# EAGLE board zasilanie.old (EAGLE 8.6.3)
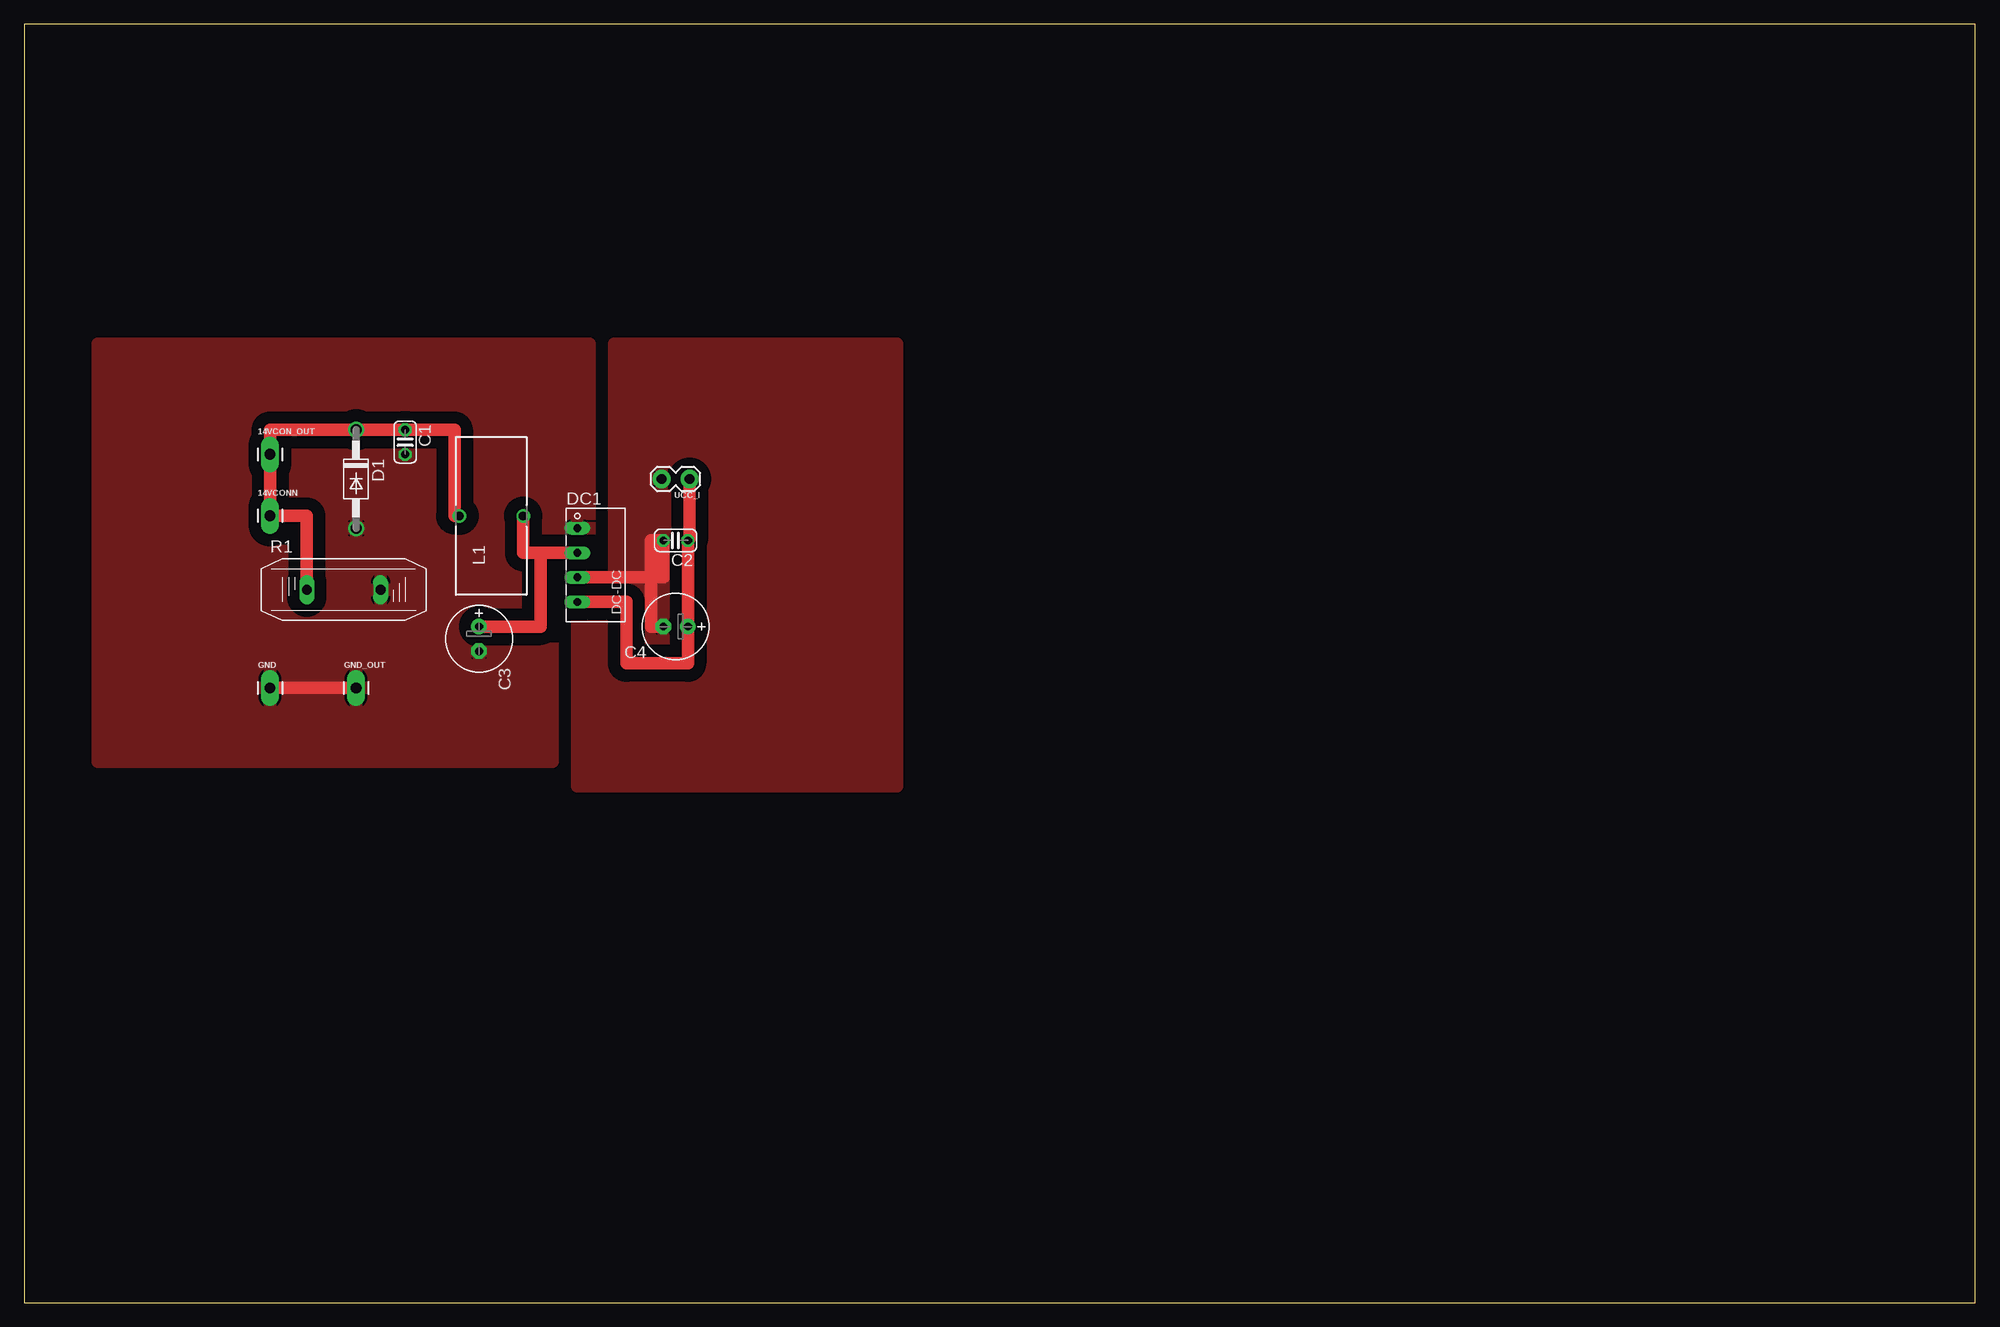
[diagram p0: board, top side]

Size 201.6 x 132.07 mm. Coordinates in mm from the lower left corner, seen from the top.
Outline: 0,0 201.6,0 201.6,132.07 0,132.07 0,0
Copper layers (1*16): Top 0.035mm / dielectric 1.5mm / Bottom 0.035mm
Design rules "default": minimum track width 6mil, minimum drill 0.35mm, track to track 6mil, track to pad 6mil, pad to pad 6mil, via to via 6mil, smd to smd 6mil, copper to edge 40mil, drill to drill 6mil, minimum pad ring 10mil, minimum via ring 8mil, stop-mask expansion 4mil, vias tented up to drill 0mil, thermal gap 10mil

## Footprints (pad centres in the part's own frame; a part is rotated, then mirrored left to right if it is on the bottom)
1X01_LONGPAD = drill 1.118 pad 1.88 long: 1 0,0
C025-024X044 = drill 0.813 octagon: 1 -1.27,0; 2 1.27,0
E2,5-7 = drill 0.813 pad 1.6: + -1.27,0 | drill 0.813 pad 1.6 octagon: - 1.27,0
DO41-10 = drill 1.118: A 5.08,0; C -5.08,0
NME = drill 0.813 long: 1 0,3.81; 2 0,1.27; 3 0,-1.27; 4 0,-3.81
TJ3-U1 = drill 0.9: 1 -3.3,0; 2 3.3,0
P595 = drill 1.016 long: 1 0,3.81; 2 0,-3.81
1X02_LOCK = drill 1.016 pad 1.88: 1 -0.178,0; 2 2.718,0

## Placement (x,y rotation side)
14VCON_OUT  [1X01_LONGPAD]  25.4,87.63 0 top
14VCONN  [1X01_LONGPAD]  25.4,81.28 0 top
C1  100nF  [C025-024X044]  39.37,88.9 270 top
C2  100nF  [C025-024X044]  67.31,78.74 180 top
C3  10uF  [E2,5-7]  46.99,68.58 270 top
C4  10uF  [E2,5-7]  67.31,69.85 180 top
D1  DIODA TRANSIL  [DO41-10]  34.29,85.09 270 top
DC1  [NME]  57.15,76.2 0 top
GND  [1X01_LONGPAD]  25.4,63.5 0 top
GND_OUT  [1X01_LONGPAD]  34.29,63.5 0 top
L1  [TJ3-U1]  48.26,81.28 0 top
R1  P595  [P595]  33.02,73.66 270 top
UCC_I  [1X02_LOCK]  68.58,85.09 180 top

## Library data of the parts
14VCON_OUT 14VCONN GND GND_OUT UCC_I = SparkFun-Connectors
C1-C4 = rcl; SPICEPREFIX: C
D1 = diode
DC1 = dc-dc-converter; MF: C & D TECHNOLOGIES, INC; MPN: NME1205D; OC_FARNELL: 1021466; OC_NEWARK: 98B8198
L1 = rcl; SPICEPREFIX: L
R1 = varistor

## Nets
GND: C1.2 C3.- D1.A DC1.1 GND.1 GND_OUT.1 R1.1
GND_I: C2.2 C4.- DC1.3 UCC_I.2
N$2: C3.+ DC1.2 L1.2
N$4: 14VCON_OUT.1 14VCONN.1 C1.1 D1.C L1.1 R1.2
UCC_I: C2.1 C4.+ DC1.4 UCC_I.1

## Tracks (layer width: path | path; a pad name or v marks a point on that pad's centre or on a via)
GND
  Top 1.27: GND.1 GND_OUT.1
  pour Top (isolate 1.27): 7.62,99.06 58.42,99.06 58.42,77.47 54.61,77.47 54.61,55.88 7.62,55.88
GND_I
  Top 1.27: C4.- 64.77,69.85 64.77,78.74 C2.2 66.04,74.93 DC1.3
  pour Top (isolate 1.27): 62.23,99.06 90.17,99.06 90.17,53.34 57.15,53.34 57.15,74.93 59.69,74.93 60.96,74.93 60.96,99.06
N$2
  Top 1.27: 53.34,77.47 53.34,69.85 C3.+ | 53.34,77.47 DC1.2 | L1.2 51.56,77.47 53.34,77.47
N$4
  Top 1.27: R1.2 29.21,81.28 14VCONN.1 14VCON_OUT.1 25.4,90.17 D1.C C1.1 44.45,90.17 44.45,81.28 L1.1
UCC_I
  Top 1.27: UCC_I.1 68.76,78.92 C2.1 C4.+ 68.58,66.04 62.23,66.04 62.23,72.39 DC1.4